# Altium PCB PCB1.PcbDoc
Units mm, origin at the board's own origin, x right, y up, seen from the top; angles counter-clockwise.
Board outline 94.2 x 98.2 mm, 2 copper layers (Top Layer, Bottom Layer); 39 components, 14 nets, 159 pads, 148 vias.
Unrouted connection lines stored in the file: 40.
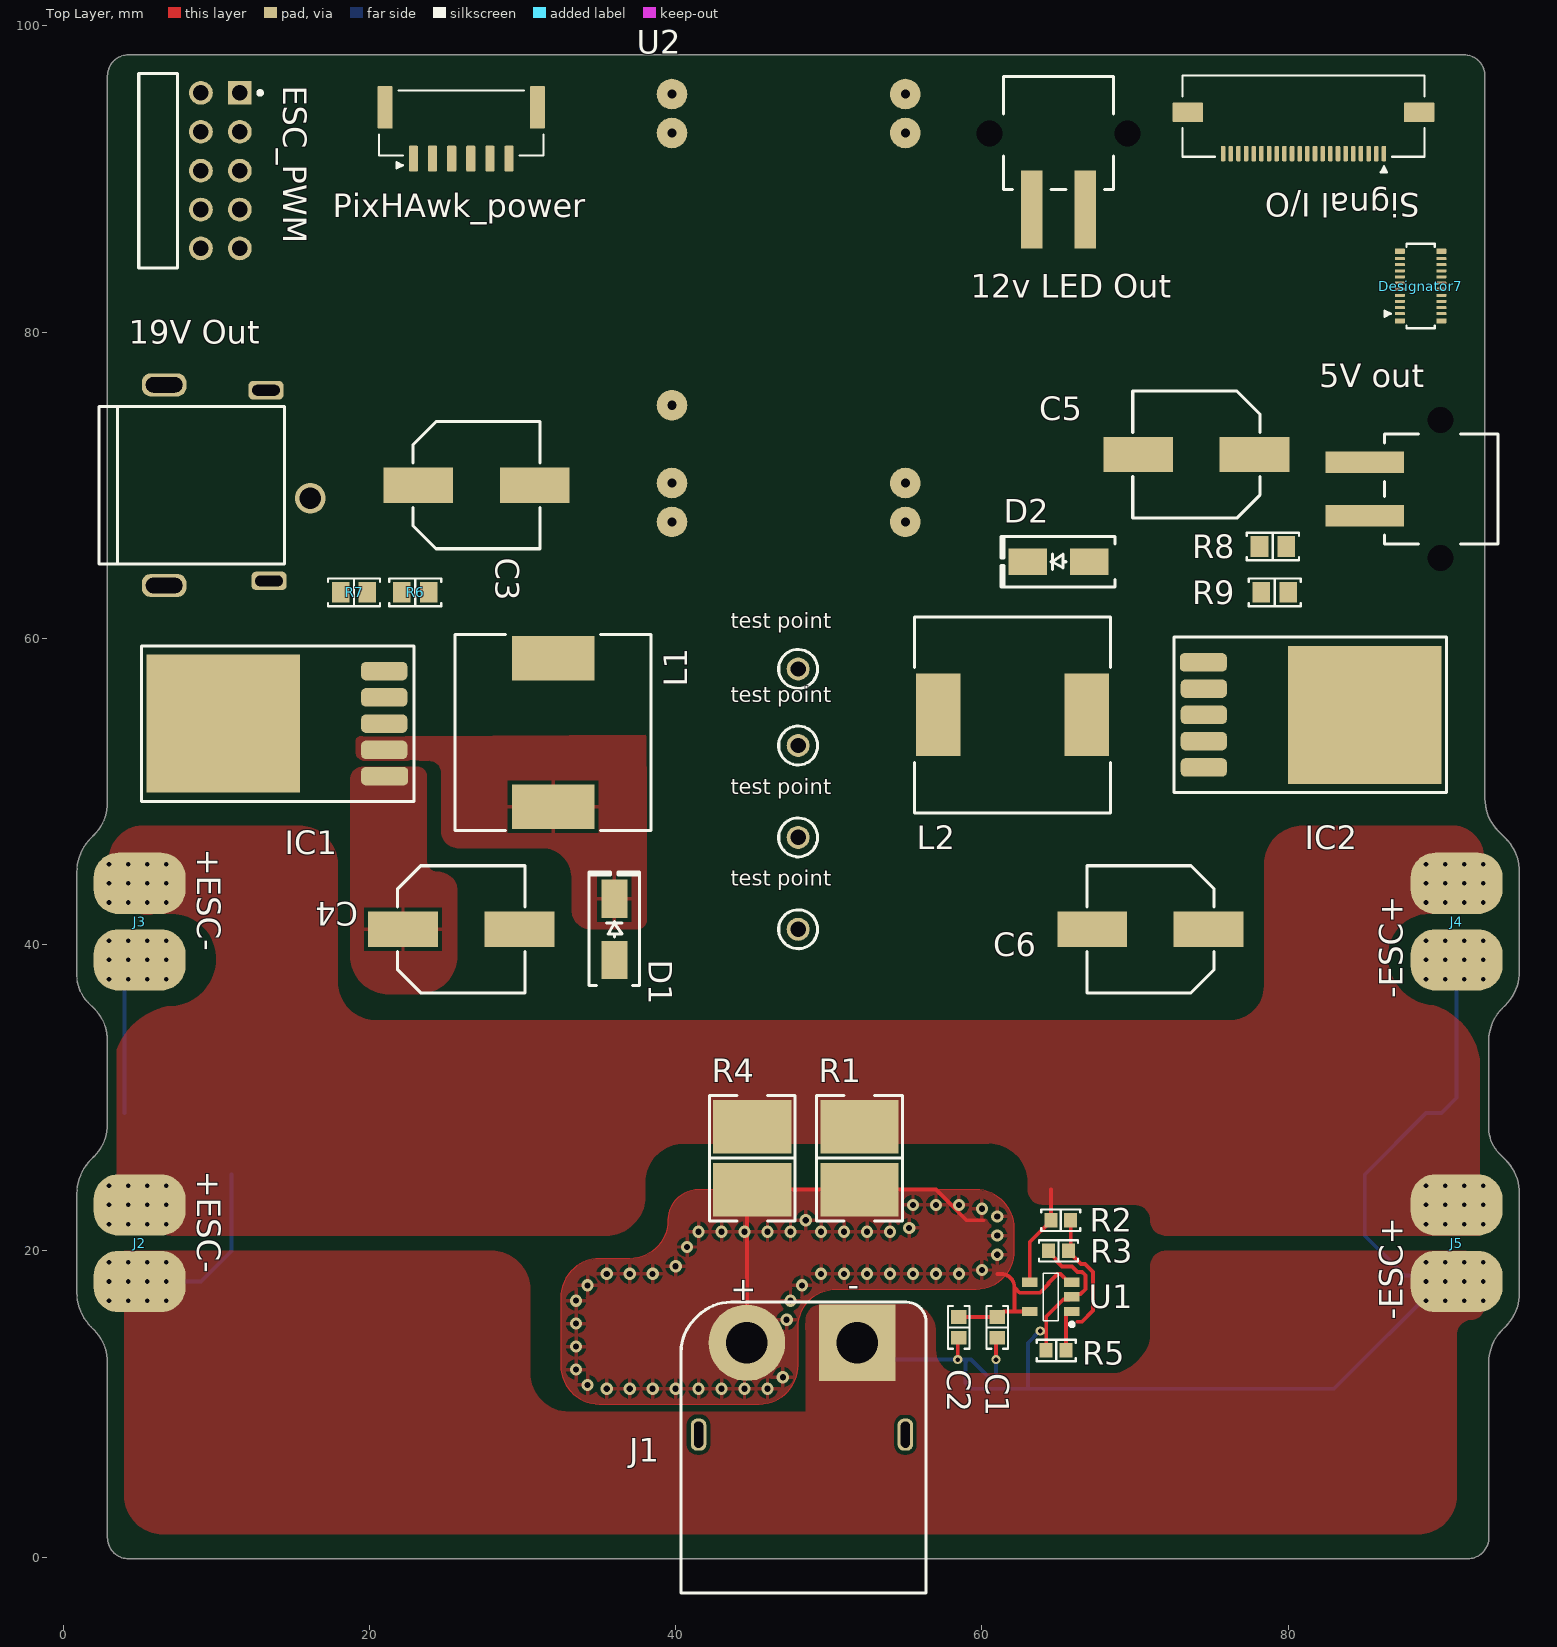
[diagram p0: Top Layer view]
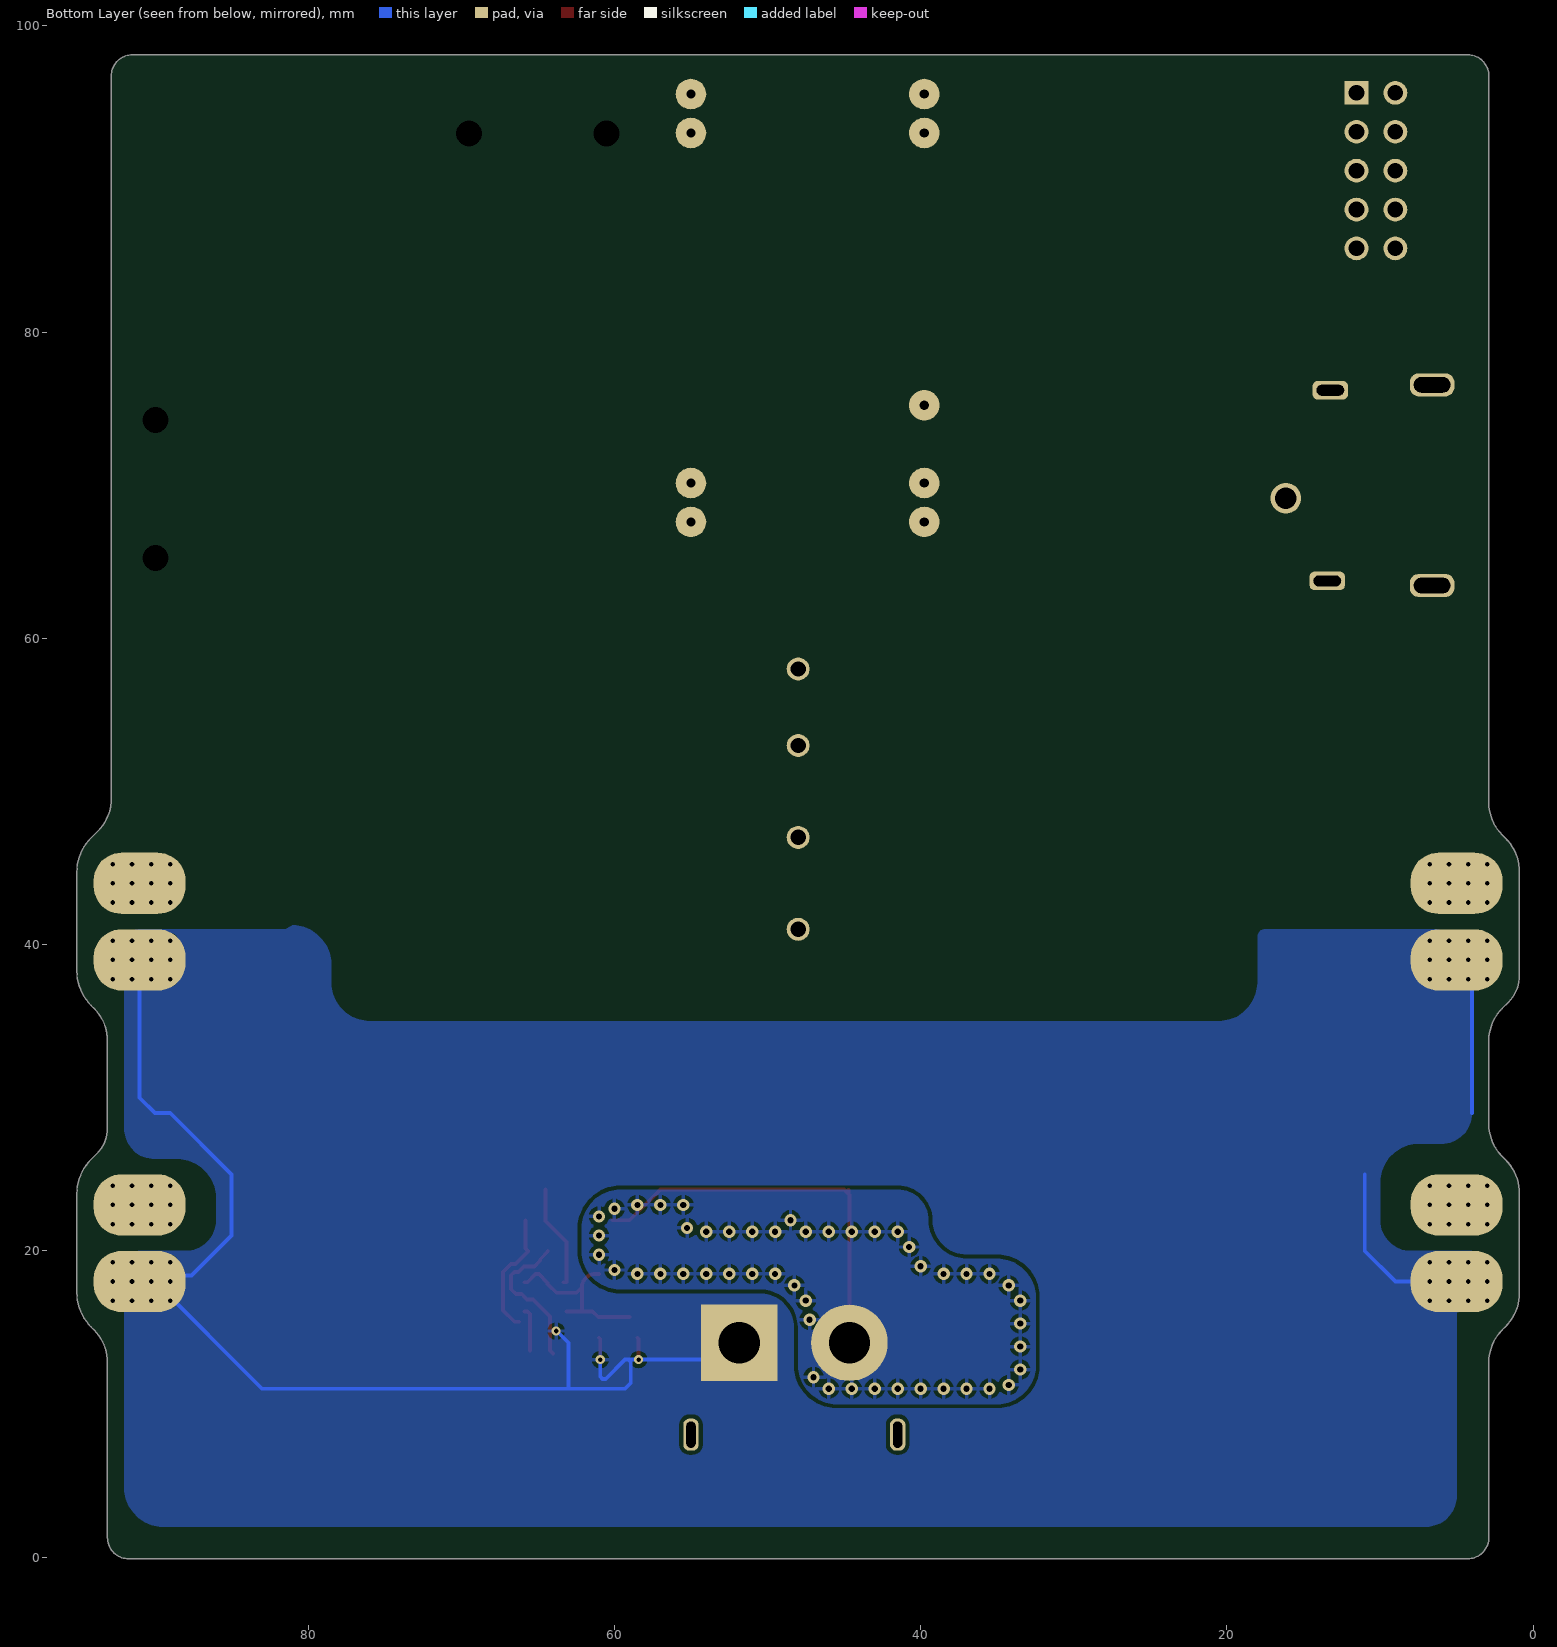
[diagram p1: Bottom Layer view, seen from below]

## Layer stack, top to bottom
Top Solder: solder mask 0.0102, Solder Resist, Dk 3.5
Top Layer: signal copper 0.0356
Dielectric 1: dielectric 0.32, FR-4, Dk 4.8
Bottom Layer: signal copper 0.0356
Bottom Solder: solder mask 0.0102, Solder Resist, Dk 3.5

## Board outline
1.827,15.031 cw(c4.066,17.27) 0.9,17.27 0.9,23.73 cw(c4.066,23.73) 1.827,25.969 2.031,26.173 ccw(c-0.066,28.27) 2.9,28.27 2.9,33.73 ccw(c-0.066,33.73) 2.031,35.827 1.636,36.222 cw(c3.414,38) 0.9,38 0.9,44.73 cw(c4.066,44.73) 1.827,46.969 2.031,47.173 ccw(c-0.066,49.27) 2.9,49.27 2.9,96.73 cw(c4.27,96.73) 4.27,98.1 91.48,98.1 cw(c91.48,96.73) 92.85,96.73 92.85,49.52 ccw(c95.816,49.52) 93.719,47.423 94.173,46.969 cw(c91.934,44.73) 95.1,44.73 95.1,38.27 cw(c91.934,38.27) 94.173,36.031 93.969,35.827 ccw(c96.066,33.73) 93.1,33.73 93.1,28 ccw(c95.414,28) 93.778,26.364 cw(c93.707,26.293) 93.778,26.364 94.173,25.969 cw(c91.934,23.73) 95.1,23.73 95.1,17.27 cw(c91.934,17.27) 94.173,15.031 93.969,14.827 ccw(c96.066,12.73) 93.1,12.73 93.1,1.27 cw(c91.73,1.27) 91.73,-0.1 4.27,-0.1 cw(c4.27,1.27) 2.9,1.27 2.9,12.73 ccw(c-0.066,12.73) 2.031,14.827

## Design rules (kind name [scope] priority, off if disabled: settings)
Clearance [All] p1: gap=0.254 ignorepadtopadclearanceinfootprint=FALSE except(0: Arc-Hole Track-Hole SMDPad-Hole THPad-Hole Via-Hole Fill-Hole Poly-Hole Region-Hole Text-Hole)
PolygonConnect [All] p1: connectstyle=Relief reliefconductorwidth=0.254 reliefentries=4 polygonreliefangle="90 Angle" airgapwidth=0.254
RoutingVias [All] p1: holewidth=0.711 width=1.27 viastyle="Through Hole" minholewidth=0.711 minwidth=1.27 maxholewidth=0.711 maxwidth=1.27
SolderMaskExpansion [All] p1: expansion=0.102 istentingtop=FALSE
Width [All] p1: maxlimit=0.254 minlimit=0.254 preferedwidth=0.254
30 further rules are at their usual default settings.

## Classes and differential pairs
component class Sheet1: "12v LED Out" "19V Out" C1 C2 C3 C4 C5 C6 D1 D2 IC1 IC2 J1 J2 J3 J4 J5 L1 L2 R1 R2 R3 R4 R5 R6 R7 R8 R9 U1 U2

## Components (designator, comment, footprint, x,y, rotation, side; value= is the part's Value field where it differs from the comment)
"5V out" "691508110302" "WURTH 691508110302" 90,69.75 r270 top (schematic designator J7)
"12v LED Out" "691508110302" "WURTH 691508110302" 65,93 r0 top (schematic designator J8)
"19V Out" "PJ-068B-SMT-TR" "CUI PJ-068B-SMT" 9,70 r90 top (schematic designator J6)
C1 "10µF" "CAP 0603_1608" 61,15 r90 top
C2 "0.1µF" "CAP 0603_1608" 58.486,15 r90 top
C3 "220µF" "CAP ALSMD 8.3MM H10.5MM" 27,70 r0 top
C4 "100µF" "CAP ALSMD 8.3MM H10.5MM" 26,41 r0 top
C5 "220µF" "CAP ALSMD 8.3MM H10.5MM" 74,72 r180 top
C6 "100µF" "CAP ALSMD 8.3MM H10.5MM" 71,41 r180 top
D1 "ACDBA560-HF" "DO214AC SMA" 36,41 r90 top
D2 "ACDBA560-HF" "DO214AC SMA" 65,65 r180 top
Designator7 "Comment" HIRO-DF40C-20DP-0.4V(51)_V 88.645,83 r90 top
ESC_PWM "Comment" FCI-68021-210HLF-10_V 10.27,90.54 r270 top
IC1 "LM2596" D2PAK 12.11,54.429 r90 top
IC2 "LM2596" D2PAK 83.349,55 r270 top
J1 "XT60pw" XT60_90degree 56.35,-2.35 r180 top
J2 "ESC PAD" "ESC Connector" 1.75,15.25 r0 top
J3 "ESC PAD" "ESC Connector" 1.75,36.25 r0 top
J4 "ESC PAD" "ESC Connector" 87.75,36.25 r0 top
J5 "ESC PAD" "ESC Connector" 87.75,15.25 r0 top
L1 "33µH" "BOURNS SRR1280" 32,53.85 r90 top
L2 "33µH" "BOURNS SRR1280" 62,55 r180 top
PixHAwk_power "Comment" JST-BM06B-GHS-TBT_V 26,93 r0 top
R1 "1 mOhms" "VISHAY WSHP2818" 52,26.055 r90 top
R2 "10 kOhms" "RES 0603_1608" 65.15,22 r180 top
R3 "10 kOhms" "RES 0603_1608" 65,20 r0 top
R4 "1 mOhms" "VISHAY WSHP2818" 45,26.055 r90 top
R5 "10 kOhms" "RES 0603_1608" 64.85,13.5 r0 top
R6 "10 kOhms" "RES 0805_2012" 23,63 r0 top
R7 "4.7 kOhms" "RES 0805_2012" 19,63 r0 top
R8 "10 kOhms" "RES 0805_2012" 79,66 r0 top
R9 "4.7 kOhms" "RES 0805_2012" 79.125,63 r0 top
"Signal I/O" "Comment" MOLX-5051102291_V 81,93 r180 top
"test point" "Comment" KSTN-5003 48,41 r0 top
"test point" "Comment" KSTN-5003 48,47 r0 top
"test point" "Comment" KSTN-5003 48,53 r0 top
"test point" "Comment" KSTN-5003 48,58 r0 top
U1 "INA169" INA169 64.5,17 r180 top
U2 "Led Driver" LDD100l 39.76,67.6 r180 top

## Footprints (in the part's own frame and the unit in brackets; to place one, negate y for a bottom-side part, rotate by r counter-clockwise, add the part's x,y. Pads: shape width x height; smd on the part's side, far side on the other; paste and mask are expansions set on the pad)
"BOURNS SRR1280" [mm] "Precision Wire Wound Inductor, 2-Leads, Body 12.50x12.50mm, IPC Medium Density"
  rect 2.9x5.4 smd: 1(-4.85,0) 2(4.85,0)
  silkscreen extent -6.4,-6.4 6.4,6.4, body extent -6.25,-6.25 6.25,6.25, height 7.9
"CAP 0603_1608" [mm] "Chip Capacitor, 2-Leads, Body 1.60x0.80mm, IPC Medium Density"
  rect 0.9x1 smd: 1(-0.675,0) 2(0.675,0)
  silkscreen extent -1.4,-0.7 1.4,0.7, body extent -0.8,-0.41 0.8,0.41, height 0.82
"CAP ALSMD 8.3MM H10.5MM" [mm] "Aluminum Electrolytic Capacitor, Body 8.30x8.30x10.50mm, IPC Low Density"
  rect 4.55x2.3 smd: 1(-3.8,0) 2(3.8,0)
  silkscreen extent -4.15,-4.15 4.15,4.15, body extent -4.95,-4.15 4.95,4.15, height 10.5
"CUI PJ-068B-SMT" [mm] "Mid Mount DC Power Jack"
  round 2 hole 1.4 unplated: 1(-0.85,-7.15)
  rrect75% 1.5x2.9 hole 1 slot 2.4 at 90 deg unplated: 2(-6.55,2.4) 2(6.55,2.4)
  rrect50% 1.2x2.3 hole 0.7 slot 1.8 at 90 deg unplated: 2(6.2,-4.25) 3(-6.25,-4.45)
  silkscreen extent -5.15,-5.45 5.15,6.65, body extent -6.55,-7.7 6.55,6.6, height 5.45
D2PAK [mm]
  rrect50% 1.2x3.075 smd: 1(-3.429,-8.89)
  rrect50% 1.2x3.015 smd: 2(-1.714,-8.86) 3(0,-8.86) 4(1.715,-8.86) 5(3.429,-8.86)
  rect 9x10 smd: 3(0,1.651)
  silkscreen extent -5.08,-10.79 5.08,6.98, body extent -4.91,-9.56 4.91,5.04, height 4.22
"DO214AC SMA" [mm] "Molded Diode, 2-Leads, Body 4.30x2.60mm, IPC Medium Density"
  rect 2.5x1.7 smd: 1(-2,0) 2(2,0)
  silkscreen extent -3.68,-1.65 3.75,1.65, body extent -2.6,-1.37 2.6,1.37, height 2.4
"ESC Connector" [mm]
  rrect80% 6x4 / inner rrect90% 6x4 / far side rrect90% 6x4 all layers, no hole: 1(3.25,7.75) 2(3.25,2.75)
FCI-68021-210HLF-10_V [mm] "THD, 10-Leads, Body 12.7x2.54mm, Pitch 2.54mm"
  rect 1.55x1.55 hole 1.02: 1(-5.08,1.27)
  round 1.55 hole 1.02: 2(-2.54,1.27) 3(0,1.27) 4(2.54,1.27) 5(5.08,1.27) 6(5.08,-1.27) 7(2.54,-1.27) 8(0,-1.27) 9(-2.54,-1.27) 10(-5.08,-1.27)
  silkscreen extent -6.35,-5.33 6.35,2.72, body extent -6.32,-11.13 6.32,1.64, height 4.83
HIRO-DF40C-20DP-0.4V(51)_V [mm] "CONN, 20-Lead, Body 5.52x1.85mm, Pitch 0.4mm"
  rrect50% 0.2x0.66 smd: 1(-1.8,1.355) 2(-1.8,-1.355) 3(-1.4,1.355) 4(-1.4,-1.355) 5(-1,1.355) 6(-1,-1.355) 7(-0.6,1.355) 8(-0.6,-1.355) 9(-0.2,1.355) 10(-0.2,-1.355) 11(0.2,1.355) 12(0.2,-1.355) 13(0.6,1.355) 14(0.6,-1.355) 15(1,1.355) 16(1,-1.355) 17(1.4,1.355) 18(1.4,-1.355) 19(1.8,1.355) 20(1.8,-1.355)
  rrect35% 0.35x0.66 smd: MP1(-2.275,1.355) MP2(-2.275,-1.355) MP3(2.275,1.355) MP4(2.275,-1.355)
  silkscreen extent -2.76,-0.92 2.76,2.35, body extent -2.76,-1.49 2.76,1.48, height 1.14
INA169 [mm] "SOT23, 5-Leads, Body 2,90x2,80mm, Pitch 0,95mm, IPC Medium Density"
  rect 1x0.6 smd: 1(-1.375,0.95) 2(-1.375,0) 3(-1.375,-0.95) 4(1.375,-0.95) 5(1.375,0.95)
  silkscreen extent -1.5,-1.55 0.5,1.92, body extent -1.5,-1.53 1.5,1.53, height 1.45
JST-BM06B-GHS-TBT_V [mm] "Connector, 6-Leads, Body 10.75x4.25mm, Pitch 1.25mm"
  rrect30% 0.6x1.7 smd: 1(-3.125,-1.675) 2(-1.875,-1.675) 3(-0.625,-1.675) 4(0.625,-1.675) 5(1.875,-1.675) 6(3.125,-1.675)
  rrect20% 1x2.8 smd: MP1(-4.975,1.675) MP2(4.975,1.675)
  silkscreen extent -5.38,-2.31 5.38,2.78, body extent -5.38,-2.17 5.37,2.78, height 4.2
KSTN-5003 [mm] "Test Point, Through Hole, Dia 2.54mm"
  round 1.5 hole 1: 1(0,0)
  silkscreen extent -1.27,-1.27 1.27,1.27, body extent -1.27,-1.27 1.27,1.27, height 4.57
LDD100l [mm]
  round 2 hole 0.6: 1(-15.24,0) 2(-15.24,-2.54) 11(-15.24,-25.4) 12(-15.24,-27.94) 13(0,-27.94) 14(0,-25.4) 21(0,-7.62) 23(0,-2.54) 24(0,0)
  body extent -17.79,-29.83 2.55,2.03, height 12.21
MOLX-5051102291_V [mm] "SMD, 22-Leads, Body 5.3x16.5mm, Pitch 0.5mm"
  rrect50% 0.3x1 smd: 1(-5.25,1.35) 2(-4.75,1.35) 3(-4.25,1.35) 4(-3.75,1.35) 5(-3.25,1.35) 6(-2.75,1.35) 7(-2.25,1.35) 8(-1.75,1.35) 9(-1.25,1.35) 10(-0.75,1.35) 11(-0.25,1.35) 12(0.25,1.35) 13(0.75,1.35) 14(1.25,1.35) 15(1.75,1.35) 16(2.25,1.35) 17(2.75,1.35) 18(3.25,1.35) 19(3.75,1.35) 20(4.25,1.35) 21(4.75,1.35) 22(5.25,1.35)
  rrect15% 2x1.3 smd: MP1(-7.55,-1.35) MP2(7.55,-1.35)
  silkscreen extent -7.9,-3.75 7.9,2.57, body extent -8.25,-3.75 8.25,1.55, height 1.9
"RES 0603_1608" [mm] "Chip Resistor, 2-Leads, Body 1.60x0.80mm, IPC Medium Density"
  rect 0.85x0.95 smd: 1(-0.65,0) 2(0.65,0)
  silkscreen extent -1.27,-0.7 1.27,0.7, body extent -0.8,-0.4 0.8,0.4, height 0.45
"RES 0805_2012" [mm] "Chip Resistor, 2-Leads, Body 2.00x1.25mm, IPC Medium Density"
  rect 1.15x1.35 smd: 1(-0.875,0) 2(0.875,0)
  silkscreen extent -1.7,-0.9 1.7,0.9, body extent -1,-0.62 1,0.63, height 0.6
"VISHAY WSHP2818" [mm] "Chip Resistor, 2-Leads, Body 7.10x4.60mm, IPC Medium Density"
  rect 3.5x5.1 smd: 1(-2.055,0) 2(2.055,0)
  silkscreen extent -4.1,-2.8 4.1,2.8, body extent -3.55,-2.3 3.55,2.3, height 1.5
"WURTH 691508110302" [mm]
  rect 1.4x5.1 smd: 1(-1.75,-5) 2(1.75,-5)
  round 1 hole 1.7 unplated: M(-4.5,-0.05) M(4.5,-0.05)
  silkscreen extent -3.6,-3.7 3.6,3.7, body extent -5.18,-7.2 5.18,3.7, height 11.2
XT60_90degree [mm]
  round 5 hole 2.7: 1(11.7,-16.35)
  rect 5x5 hole 2.7: 2(4.5,-16.35)
  rrect80% 1x2.1 hole 0.6 slot 1.7 at 90 deg: 4(1.35,-10.35) 4(14.85,-10.35)
  silkscreen extent 0,-19 16,0, body extent 0.33,-17.6 15.82,0, height 9.2

## Part data
"5V out" "12v LED Out": "TERM BLOCK 2POS 3.5MM SMD", Color=Black, Current=10A, Manufacturer="Würth Elektronik", Supplier Part Number 1=732-5963-1-ND, Voltage=300V, ComponentLink1Description=Datasheet, ComponentLink1URL=https://katalog.we-online.de/em/datasheet/6915081103xx.pdf, ComponentLink2Description="DigiKey Link", ComponentLink2URL=http://digikey.com/product-detail/en/w-rth-elektronik/691508110302/732-5963-1-ND/5047612, Features="Board Guide, Mounting Flange", LastUpdated="15.01.2020 04:18:55", Lifecycle Status=Active, Mating Orientation="Horizontal and Vertical with Board", Minimum Order=1, Mounting Type="Surface Mount", Number of Levels=1, Packaging=TapeAndReel, Part Number=691508110302, Part Status=Active, Pitch="0.138\" (3.50mm)", Positions Per Level=2, Price=1.57, Series="WR-TBL Series 5081", Supplier 1=DigiKey, Wire Gauge="16-30 AWG", Wire Termination="Screw - Rising Cage Clamp"
"19V Out": "CONN PWR JACK 2.5X5.5MM SOLDER", Current Rating (Amps)=5A, Manufacturer="CUI Devices", Material Flammability Rating="UL94 V-0", Supplier Part Number 1=CP-068BPJTR-ND, Voltage - Rated=24VDC, Actual Diameter="0.098\" (2.50mm ID), 0.232\" (5.90mm OD)", ComponentLink1Description=Datasheet, ComponentLink1URL=https://www.cuidevices.com/product/resource/digikeypdf/pj-068b-smt-tr.pdf, ComponentLink2Description="DigiKey Link", ComponentLink2URL=//digikey.com/product-detail/en/cui-devices/PJ-068B-SMT-TR/CP-068BPJTR-ND/2625163, Connector Type=Jack, Features="Board Guide", Gender=Male, LastUpdated="16.12.2019 18:57:10", Lifecycle Status=0, Mating Length/Depth="0.323\" (8.20mm)", Minimum Order=1, Mounting Type="Surface Mount, Right Angle", Number of Positions/Contacts="2 Conductors, 3 Contacts", Packaging=TapeAndReel, Part Number=PJ-068B-SMT-TR, Part Status=Active, Price=1.38, Series=-, Shielding=Shielded, Supplier 1=DigiKey, Termination=Solder, Industry Recognized Mating Diameter="2.50mm ID (0.098\"), 5.50mm OD (0.217\")", Internal Switch(s)="Single Switch, Normally Closed"
C1: library part GRM188R6YA106MA73D, "CAP CER 10UF 35V X5R 0603", Device Package="0603 (1608 Metric)", Manufacturer="Murata Electronics", Operating Temperature="-55°C ~ 85°C", Supplier Part Number 1=490-13248-1-ND, Temperature Coefficient=X5R, Tolerance=±20%, Voltage - Rated=35V, Applications="General Purpose", Capacitance=10µF, ComponentLink1Description=Datasheet, ComponentLink1URL=https://www.murata.com/~/media/webrenewal/support/library/catalog/products/capacitor/mlcc/c02e.ashx?la=en-us, ComponentLink2Description="DigiKey Link", ComponentLink2URL=http://digikey.com/product-detail/en/murata-electronics/GRM188R6YA106MA73D/490-13248-1-ND/5877456, LastUpdated="2.09.2020 01:03:25", Lifecycle Status=Active, Minimum Order=1, Mounting Type="Surface Mount, MLCC", Package / Case="0603 (1608 Metric)", Packaging=TapeAndReel, Part Number=GRM188R6YA106MA73D, Part Status=Active, PartId=8560, Price=0.09, Series=GRM, Size / Dimension="0.063\" L x 0.031\" W (1.60mm x 0.80mm)", Supplier 1=DigiKey, Thickness (Max)="0.039\" (1.00mm)"
C2: library part GMK107BJ104KAHT, "CAP CER 0.1UF 35V X5R 0603", Device Package="0603 (1608 Metric)", Manufacturer="Taiyo Yuden", Operating Temperature="-55°C ~ 85°C", Ratings=AEC-Q200, Supplier Part Number 1=587-3357-1-ND, Temperature Coefficient=X5R, Tolerance=±10%, Voltage - Rated=35V, Applications=Automotive, Capacitance=0.1µF, ComponentLink1Description=Datasheet, ComponentLink1URL="https://ds.yuden.co.jp/TYCOMPAS/ut/detail?pn=GMK107BJ104KAHT  &u=M", ComponentLink2Description="DigiKey Link", ComponentLink2URL=http://digikey.com/product-detail/en/taiyo-yuden/GMK107BJ104KAHT/587-3357-1-ND/4157244, LastUpdated="2.09.2020 01:03:32", Lifecycle Status=Active, Minimum Order=1, Mounting Type="Surface Mount, MLCC", Package / Case="0603 (1608 Metric)", Packaging=TapeAndReel, Part Number=GMK107BJ104KAHT, Part Status=Active, PartId=4191, Price=0.02, Series=M, Size / Dimension="0.063\" L x 0.031\" W (1.60mm x 0.80mm)", Supplier 1=DigiKey, Thickness (Max)="0.035\" (0.90mm)"
C3 C5: library part EEE-FK1V221GP, "CAP ALUM 220UF 20% 35V SMD", Device Package="Radial, Can - SMD", Lifetime @ Temp.="5000 Hrs @ 105°C", Manufacturer="Panasonic Electronic Components", Operating Temperature="-55°C ~ 105°C", Ratings=AEC-Q200, Ripple Current @ High Frequency="600mA @ 100kHz", Ripple Current @ Low Frequency="450mA @ 120Hz", Supplier Part Number 1=PCE4321CT-ND, Tolerance=±20%, Voltage - Rated=35V, Applications=Automotive, Capacitance=220µF, ComponentLink1Description=Datasheet, ComponentLink1URL=http://industrial.panasonic.com/www-cgi/jvcr13pz.cgi?E+PZ+4+ABA0120+EEEFK1V221GP+8+WW, ComponentLink2Description="DigiKey Link", ComponentLink2URL=http://digikey.com/product-detail/en/panasonic-electronic-components/EEE-FK1V221GP/PCE4321CT-ND/1014320, Height - Seated (Max)="0.413\" (10.50mm)", LastUpdated="2.09.2020 01:25:16", Lifecycle Status=Active, Minimum Order=1, Mounting Type="Surface Mount", Package / Case="Radial, Can - SMD", Packaging=TapeAndReel, Part Number=EEE-FK1V221GP, Part Status=Active, PartId=7494, Polarization=Polar, Price=0.33, Series=FK, Size / Dimension="0.315\" Dia (8.00mm)", Supplier 1=DigiKey, Surface Mount Land Size="0.327\" L x 0.327\" W (8.30mm x 8.30mm)", Impedance="160 mOhms"
C4 C6: library part UCD1V101MNL1GS, "CAP ALUM 100UF 20% 35V SMD", Device Package="Radial, Can - SMD", Lifetime @ Temp.="5000 Hrs @ 105°C", Manufacturer=Nichicon, Operating Temperature="-55°C ~ 105°C", Ratings=AEC-Q200, Ripple Current @ High Frequency="600mA @ 100kHz", Ripple Current @ Low Frequency="300mA @ 120Hz", Supplier Part Number 1=493-6186-1-ND, Tolerance=±20%, Voltage - Rated=35V, Applications=Automotive, Capacitance=100µF, ComponentLink1Description=Datasheet, ComponentLink1URL=http://nichicon-us.com/english/products/pdfs/e-ucd.pdf, ComponentLink2Description="DigiKey Link", ComponentLink2URL=http://digikey.com/product-detail/en/nichicon/UCD1V101MNL1GS/493-6186-1-ND/3438699, Height - Seated (Max)="0.413\" (10.50mm)", LastUpdated="2.09.2020 01:25:16", Lifecycle Status=Active, Minimum Order=1, Mounting Type="Surface Mount", Package / Case="Radial, Can - SMD", Packaging=TapeAndReel, Part Number=UCD1V101MNL1GS, Part Status=Active, PartId=7455, Polarization=Polar, Price=0.19, Series=UCD, Size / Dimension="0.315\" Dia (8.00mm)", Supplier 1=DigiKey, Surface Mount Land Size="0.327\" L x 0.327\" W (8.30mm x 8.30mm)", Impedance="160 mOhms"
D1 D2: "DIODE SCHOTTKY 60V 5A DO214AC", Capacitance @ Vr, F="250pF @ 4V, 1MHz", Current - Average Rectified (Io)="5A (DC)", Current - Reverse Leakage @ Vr="500µA @ 60V", Manufacturer="Comchip Technology", Operating Temperature - Junction="-55°C ~ 125°C", Package / Case="DO-214AC, SMA", Supplier Device Package="DO-214AC (SMA)", Supplier Part Number 1=641-2078-1-ND, Voltage - DC Reverse (Vr) (Max)=60V, Voltage - Forward (Vf) (Max) @ If="700mV @ 5A", ComponentLink1Description=Datasheet, ComponentLink1URL=http://www.comchiptech.com/admin/files/product/ACDBA560-HF%20RevA201382.pdf, ComponentLink2Description="DigiKey Link", ComponentLink2URL=http://digikey.com/product-detail/en/comchip-technology/ACDBA560-HF/641-2078-1-ND/10131664, Diode Type=Schottky, LastUpdated="2.09.2020 01:19:04", Lifecycle Status=Active, Minimum Order=1, Mounting Type="Surface Mount", Packaging=TapeAndReel, Part Number=ACDBA560-HF, Part Status=Active, PartId=1832, Price=0.13, Series="Automotive, AEC-Q101", Speed="Fast Recovery =< 500ns, > 200mA (Io)", Supplier 1=DigiKey
J1: library part XT60PW-M, "xt60 90 degree Connector"
J2 J3 J4 J5: library part "ESC Connector"
L1 L2: library part SRR1280-330M, "FIXED IND 33UH 3.5A 57 MOHM SMD", Current - Saturation=3.3A, Current Rating (Amps)=3.5A, DC Resistance (DCR)="57mOhm Max", Device Package=Nonstandard, Frequency - Self Resonant=9.5MHz, Manufacturer="Bourns Inc.", Operating Temperature="-40°C ~ 125°C", Q @ Freq="28 @ 2.52MHz", Supplier Part Number 1=SRR1280-330MCT-ND, Tolerance=±20%, Inductance Frequency - Test=100kHz, ComponentLink1Description=Datasheet, ComponentLink1URL=https://www.bourns.com/docs/Product-Datasheets/SRR1280.pdf, ComponentLink2Description="DigiKey Link", ComponentLink2URL=http://digikey.com/product-detail/en/bourns-inc/SRR1280-330M/SRR1280-330MCT-ND/2127440, Height - Seated (Max)="0.315\" (8.00mm)", LastUpdated="2.09.2020 01:22:09", Lifecycle Status=Active, Material - Core=Ferrite, Minimum Order=1, Mounting Type="Surface Mount", Package / Case=Nonstandard, Packaging=TapeAndReel, Part Number=SRR1280-330M, Part Status=Active, PartId=25, Price=0.65, Series=SRR1280, Shielding=Shielded, Size / Dimension="0.492\" L x 0.492\" W (12.50mm x 12.50mm)", Supplier 1=DigiKey, Type=Wirewound, Inductance=33µH
R1 R4: library part WSHP28181L000FEA, "RES 0.001 OHM 1% 10W 2818", Device Package=Nonstandard, Manufacturer="Vishay Dale", Operating Temperature="-65°C ~ 170°C", Power (Watts)=10W, Ratings=AEC-Q200, Supplier Device Package=2818, Supplier Part Number 1=541-3272-1-ND, Temperature Coefficient=±200ppm/°C, Tolerance=±1%, ComponentLink1Description=Datasheet, ComponentLink1URL=http://www.vishay.com/docs/30347/wshp2818.pdf, ComponentLink2Description="DigiKey Link", ComponentLink2URL=http://digikey.com/product-detail/en/vishay-dale/WSHP28181L000FEA/541-3272-1-ND/6605248, Composition="Metal Element", Features="Automotive AEC-Q200, Current Sense, Moisture Resistant, Pulse Withstanding", Height - Seated (Max)="0.069\" (1.75mm)", LastUpdated="2.09.2020 01:27:09", Lifecycle Status=Active, Minimum Order=1, Number of Terminations=2, Package / Case=Nonstandard, Packaging=TapeAndReel, Part Number=WSHP28181L000FEA, Part Status=Active, PartId=2682, Price=0.90, Resistance="1 mOhms", Series=WSHP2818, Size / Dimension="0.280\" L x 0.181\" W (7.10mm x 4.60mm)", Supplier 1=DigiKey
R2 R3 R5: library part RNCS0603BKE10K0, "RES 10K OHM 0.1% 1/16W 0603", Device Package="0603 (1608 Metric)", Manufacturer="Stackpole Electronics Inc", Operating Temperature="-55°C ~ 155°C", Power (Watts)="0.063W, 1/16W", Ratings=AEC-Q200, Supplier Device Package=0603, Supplier Part Number 1=RNCS0603BKE10K0CT-ND, Temperature Coefficient=±25ppm/°C, Tolerance=±0.1%, ComponentLink1Description=Datasheet, ComponentLink1URL=https://www.seielect.com/catalog/sei-rncs_rnch.pdf, ComponentLink2Description="DigiKey Link", ComponentLink2URL=http://digikey.com/product-detail/en/stackpole-electronics-inc/RNCS0603BKE10K0/RNCS0603BKE10K0CT-ND/1800113, Composition="Thin Film", Features="Anti-Corrosive, Automotive AEC-Q200, Moisture Resistant", Height - Seated (Max)="0.022\" (0.55mm)", LastUpdated="2.09.2020 01:10:25", Lifecycle Status=Active, Minimum Order=1, Number of Terminations=2, Package / Case="0603 (1608 Metric)", Packaging=TapeAndReel, Part Number=RNCS0603BKE10K0, Part Status=Active, PartId=4838, Price=0.08, Resistance="10 kOhms", Series=RNCS, Size / Dimension="0.061\" L x 0.031\" W (1.55mm x 0.80mm)", Supplier 1=DigiKey
R6 R8: library part RNCP0805FTD10K0, "RES 10K OHM 1% 1/4W 0805", Device Package="0805 (2012 Metric)", Manufacturer="Stackpole Electronics Inc", Operating Temperature="-55°C ~ 155°C", Power (Watts)="0.25W, 1/4W", Supplier Device Package=0805, Supplier Part Number 1=RNCP0805FTD10K0CT-ND, Temperature Coefficient=±100ppm/°C, Tolerance=±1%, ComponentLink1Description=Datasheet, ComponentLink1URL=https://www.seielect.com/catalog/sei-rncp.pdf, ComponentLink2Description="DigiKey Link", ComponentLink2URL=http://digikey.com/product-detail/en/stackpole-electronics-inc/RNCP0805FTD10K0/RNCP0805FTD10K0CT-ND/2240601, Composition="Thin Film", Features="Anti-Sulfur, Moisture Resistant", Height - Seated (Max)="0.024\" (0.60mm)", LastUpdated="2.09.2020 01:15:23", Lifecycle Status=Active, Minimum Order=1, Number of Terminations=2, Package / Case="0805 (2012 Metric)", Packaging=TapeAndReel, Part Number=RNCP0805FTD10K0, Part Status=Active, PartId=28021, Price=0.01, Resistance="10 kOhms", Series=RNCP, Size / Dimension="0.079\" L x 0.049\" W (2.00mm x 1.25mm)", Supplier 1=DigiKey
R7 R9: library part CRGP0805F4K7, "CRGP 0805 4K7 1%", Device Package="0805 (2012 Metric)", Manufacturer="TE Connectivity Passive Product", Operating Temperature="-55°C ~ 155°C", Power (Watts)="0.333W, 1/3W", Supplier Device Package=0805, Supplier Part Number 1=A130485CT-ND, Temperature Coefficient=±100ppm/°C, Tolerance=±1%, ComponentLink1Description=Datasheet, ComponentLink1URL=https://www.te.com/commerce/DocumentDelivery/DDEController?Action=srchrtrv&DocNm=9-1773463-9&DocType=DS&DocLang=English, ComponentLink2Description="DigiKey Link", ComponentLink2URL=http://digikey.com/product-detail/en/te-connectivity-passive-product/CRGP0805F4K7/A130485CT-ND/8578317, Composition="Thick Film", Features="Pulse Withstanding", Height - Seated (Max)="0.026\" (0.65mm)", LastUpdated="2.09.2020 01:15:22", Lifecycle Status=Active, Minimum Order=1, Number of Terminations=2, Package / Case="0805 (2012 Metric)", Packaging=TapeAndReel, Part Number=CRGP0805F4K7, Part Status=Active, PartId=28726, Price=0.02, Resistance="4.7 kOhms", Series=CRGP, Size / Dimension="0.079\" L x 0.049\" W (2.00mm x 1.25mm)", Supplier 1=DigiKey
U1: "Current sensing IC"
U2: library part LDD1000L, "LDD 1000L 12V 1A", ComponentLink1Description="New link", ComponentLink1URL=https://www.meanwell-web.com/en-gb/dc-dc-step-down-led-driver-constant-current-cc-ldd--1000l

## Via types
v1: diameter 0.45, hole 0.3, Top Layer to Bottom Layer, 96 vias
v2: diameter 0.8, hole 0.4, Top Layer to Bottom Layer, 49 vias
v3: diameter 0.6, hole 0.3, Top Layer to Bottom Layer, tented both sides, 3 vias

## Nets (pads, with @x,y where several pads share a name; then routed paths per layer and width w, separated by ;. In a path a pad name is that pad's centre, name@x,y a point inside that pad or via, vN(x,y) a via of type N, cw(c..) or ccw(c..) an arc to the next point about the centre after c; other vN are vias at no path point)
+5V: "5V out.1" C5.1 L2.2 R8.2
+12: "19V Out.1" C3.1 L1.2 R6.2
FeedBack: IC1.4 R6.1 R7.2
"FeedBack 5V": IC2.4 R8.1 R9.2
GND: "5V out.2" "19V Out.2" "19V Out.3" C1.1 C2.1 C3.2 C4.2 C5.2 C6.2 D1.1 D2.1 IC1.3 IC1.5 IC2.3 IC2.5 J1.2 J2.2 J3.2 J4.2 J5.2 R3.1 R5.1 R7.1 R9.1 U1.2 U2.1 U2.2 | length 113.9
  Top Layer w0.254: v3(58.42,12.9) 58.42,14.259 C2.1 ; v3(60.92,12.9) 60.92,14.245 C1.1 ; v3(63.806,14.766) 63.872,14.699 64.108,14.699 64.2,14.607 ; R5.1@64,13.3 R5.1 64.2,14.607 ; R3.1 64.35,19.95 64.844,19.456 64.844,19.367 65.221,18.99 65.891,18.99 66.251,18.631 66.533,18.631 66.756,18.408 66.756,17.492 66.437,17.173 66.048,17.173 U1.2 65.702,16.827 65.313,16.827 64.2,15.714 64.2,14.607
  Bottom Layer w0.254: 4,29 J3.2@4,38 ; v1(5.5,18) v1(6.75,18) 9,18 11,20 11,25 ; J1.2 52.95,12.9 v3(58.42,12.9) 59.077,12.9 ; v3(60.92,12.9) 60.92,11.788 60.772,11.639 60.561,11.639 59.3,12.9 59.077,12.9 ; v3(63.806,14.766) 63.766,14.766 63,14 63,11 ; J4.2 91,30 90,29 89,29 85,25 85,21 87.619,18.381 90.619,18.381 J5.2 v1(90.25,18) 90,18 83,11 63,11 ; 59.077,12.9 58.928,12.751 58.928,11.372 59.3,11 63,11
  other v1: 3,16.75 4.25,16.75 5.5,16.75 6.75,16.75 89,16.75 90.25,16.75 91.5,16.75 92.75,16.75 3,18 4.25,18 89,18 91.5,18 92.75,18 3,19.25 4.25,19.25 5.5,19.25 6.75,19.25 89,19.25 90.25,19.25 91.5,19.25 92.75,19.25 3,37.75 4.25,37.75 5.5,37.75 6.75,37.75 89,37.75 90.25,37.75 91.5,37.75 92.75,37.75 3,39 4.25,39 5.5,39 6.75,39 89,39 90.25,39 91.5,39 92.75,39 3,40.25 4.25,40.25 5.5,40.25 6.75,40.25 89,40.25 90.25,40.25 91.5,40.25 92.75,40.25
NetC1_2: C1.2 C2.2 J1.1 R1.1 R4.1 U1.3 U1.5 | length 38.5
  Top Layer w0.254: J1.1 44.65,23.65 R4.1 R1.1 57,24 59,22 60.123,22 ; R4.1@44.7,23.763 R4.1@44.7,23.981 ; 59,15.675 C1.2 61.05,15.675 61.425,16.05 62,16.05 ; 61,18.5 61.236,18.5 cw(c61.236,17.613) 62.123,17.613 ; U1.5 62,16.05 ; U1.3 65.675,17.95 65.143,18.482 64.932,18.482 64.358,17.907 64.358,17.844 63.783,17.269 62.467,17.269 62.123,17.613 ; 62,16.05 ccw(c62,16.173) 62.123,16.173 62.123,17.613
  other v2: 35.5,11 37,11 38.5,11 40,11 41.5,11 43,11 44.5,11 46,11 34.25,11.25 47,11.75 33.5,12.25 33.5,13.75 33.5,15.25 47.25,15.5 33.5,16.75 47.5,16.75 34.25,17.75 48.25,17.75 35.5,18.5 37,18.5 38.5,18.5 49.5,18.5 51,18.5 52.5,18.5 54,18.5 55.5,18.5 57,18.5 58.5,18.5 60,18.75 40,19 61,19.75 40.75,20.25 61,21 41.5,21.25 43,21.25 44.5,21.25 46,21.25 47.5,21.25 49.5,21.25 51,21.25 52.5,21.25 54,21.25 55.25,21.5 48.5,22 61,22.25 60,22.75 55.5,23 57,23 58.5,23
NetD1_2: D1.2 IC1.2 L1.1
NetD2_2: D2.2 IC2.2 L2.1
NetJ8_1: "12v LED Out.1" U2.13 U2.14
NetJ8_2: "12v LED Out.2" U2.11 U2.12
NetR2_1: R2.1 R3.2 | length 8.1
  Top Layer w0.254: R2.1 65.8,20.15 R3.2 65.65,19.95 66.461,19.139 66.743,19.139 67.264,18.618 67.264,16.1 66.533,15.369 66.234,15.369
NetR5_2: R5.2 U1.1 | length 2.8
  Top Layer w0.254: R5.2 65.5,15.875 65.675,16.05 U1.1
NetU2_21: U2.21
VCC: C4.1 C6.1 IC1.1 IC2.1 J2.1 J3.1 J4.1 J5.1 R1.2 R2.2 R4.2 U1.4 U2.23 U2.24 | length 6.8
  Top Layer w0.254: U1.4@63.325,17.95 U1.4 63.125,20.575 64.5,21.95 R2.2 64.5,24
  other v1: 3,21.75 4.25,21.75 5.5,21.75 6.75,21.75 89,21.75 90.25,21.75 91.5,21.75 92.75,21.75 3,23 4.25,23 5.5,23 6.75,23 89,23 90.25,23 91.5,23 92.75,23 3,24.25 4.25,24.25 5.5,24.25 6.75,24.25 89,24.25 90.25,24.25 91.5,24.25 92.75,24.25 3,42.75 4.25,42.75 5.5,42.75 6.75,42.75 89,42.75 90.25,42.75 91.5,42.75 92.75,42.75 3,44 4.25,44 5.5,44 6.75,44 89,44 90.25,44 91.5,44 92.75,44 3,45.25 4.25,45.25 5.5,45.25 6.75,45.25 89,45.25 90.25,45.25 91.5,45.25 92.75,45.25
pads on no net: "5V out.M" "12v LED Out.M" "Signal I/O.1" "Signal I/O.2" "Signal I/O.3" "Signal I/O.4" "Signal I/O.5" "Signal I/O.6" "Signal I/O.7" "Signal I/O.8" "Signal I/O.9" "Signal I/O.10" "Signal I/O.11" "Signal I/O.12" "Signal I/O.13" "Signal I/O.14" "Signal I/O.15" "Signal I/O.16" "Signal I/O.17" "Signal I/O.18" "Signal I/O.19" "Signal I/O.20" "Signal I/O.21" "Signal I/O.22" "Signal I/O.MP1" "Signal I/O.MP2" "test point.1" Designator7.1 Designator7.2 Designator7.3 Designator7.4 Designator7.5 Designator7.6 Designator7.7 Designator7.8 Designator7.9 Designator7.10 Designator7.11 Designator7.12 Designator7.13 Designator7.14 Designator7.15 Designator7.16 Designator7.17 Designator7.18 Designator7.19 Designator7.20 Designator7.MP1 Designator7.MP2 Designator7.MP3 Designator7.MP4 ESC_PWM.1 ESC_PWM.2 ESC_PWM.3 ESC_PWM.4 ESC_PWM.5 ESC_PWM.6 ESC_PWM.7 ESC_PWM.8 ESC_PWM.9 ESC_PWM.10 J1.4 PixHAwk_power.1 PixHAwk_power.2 PixHAwk_power.3 PixHAwk_power.4 PixHAwk_power.5 PixHAwk_power.6 PixHAwk_power.MP1 PixHAwk_power.MP2
copper on no net: | length 0
  Bottom Layer w0.254: 58.4,12.88 58.42,12.9

## Polygon pours and split planes (outlines as drawn)
NetD1_2 on Top Layer "NONET_L01_P-001" (solid, pour order 10): 19.1,53.3 cw(c19.4,53.3) 19.4,53.6 23.1,53.6 38,53.7 38.094,53.606 38.094,52.109 38.1,51.2 38.1,41.6 cw(c37.5,41.6) 37.5,41 34.5,41 cw(c34.5,42.3) 33.2,42.3 33.2,44.4 ccw(c31.3,44.4) 31.3,46.3 25.8,46.3 cw(c25.8,47.4) 24.7,47.4 24.7,51.2 ccw(c23.9,51.2) 23.9,52 19.7,52 cw(c19.7,52.6) 19.1,52.6
VCC on Top Layer "NONET_L01_P-001" (solid, pour order 9): 18.75,50.8 cw(c19.55,50.8) 19.55,51.6 23.15,51.6 cw(c23.15,51) 23.75,51 23.75,45.5 ccw(c24.5,45.5) 24.5,44.75 cw(c24.5,43.5) 25.75,43.5 25.75,39.29 cw(c23.21,39.29) 23.21,36.75 21.29,36.75 cw(c21.29,39.29) 18.75,39.29
VCC on Top Layer "VCC" (solid, pour order 0): 76.175,35.05 ccw(c76.175,37.3) 78.425,37.3 78.425,45.227 cw(c80.965,45.227) 80.965,47.767 88.34,47.767 91.039,47.767 cw(c90.613,45.637) 92.75,45.25 92,43 cw(c91,43) 91,42 89.5,42 ccw(c89.25,39.25) 86.5,39.5 ccw(c89.734,39.265) 89.5,36.031 cw(c88.147,31.842) 92.5,32.5 92.5,21 72,21 cw(c72,22) 71,22 ccw(c70,22) 70,23 64,23 cw(c64,24) 63,24 63,24.46 ccw(c60.46,24.46) 60.46,27 40.54,27 ccw(c40.54,24.46) 38,24.46 38,23.54 cw(c35.46,23.54) 35.46,21 7.05,21 cw(c7.134,25.3) 3.5,23 3.5,33.13 cw(c7.714,31.56) 6.784,35.96 ccw(c6.886,39.073) 10,39 ccw(c7.102,39.102) 7.204,42 6,42 cw(c5.5,44.5) 3,44 3,45 cw(c5.355,45.42) 4.936,47.775 15.385,47.775 cw(c15.385,45.235) 17.925,45.235 17.925,37.59 ccw(c20.465,37.59) 20.465,35.05
NetC1_2 on Top Layer "NONET_L01_P-001" (solid, pour order 5): 45,24 41.5,24 ccw(c41.5,22) 39.5,22 cw(c37,22) 37,19.5 35.04,19.5 ccw(c35.04,16.96) 32.5,16.96 32.5,12.5 ccw(c35,12.5) 35,10 45.46,10 ccw(c45.46,12.54) 48,12.54 48,15 cw(c50.5,15) 50.5,17.5 59.623,17.5 ccw(c59.623,20) 62.123,20 62.123,21.46 ccw(c59.583,21.46) 59.583,24 44.719,24 ccw(c44.719,23.981) 44.7,23.981
NetC1_2 on Top Layer "NONET_L01_P-001" (solid, pour order 1): 45,24 41.5,24 ccw(c41.5,22) 39.5,22 cw(c37,22) 37,19.5 35.04,19.5 ccw(c35.04,16.96) 32.5,16.96 32.5,12.5 ccw(c35,12.5) 35,10 45.46,10 ccw(c45.46,12.54) 48,12.54 48,15 cw(c50.5,15) 50.5,17.5 59.623,17.5 ccw(c59.623,20) 62.123,20 62.123,21.46 ccw(c59.583,21.46) 59.583,24 44.719,24 ccw(c44.719,23.981) 44.7,23.981
GND on Top Layer "NONET_L01_P-001" (solid, pour order 7): 4,4.04 ccw(c6.54,4.04) 6.54,1.5 54.96,1.5 ccw(c54.96,4.04) 57.5,4.04 57.5,9.5 33.04,9.5 cw(c33.04,12.04) 30.5,12.04 30.5,17.46 ccw(c27.96,17.46) 27.96,20 4,20
GND on Top Layer "NONET_L01_P-001" (solid, pour order 3): 48.5,12.5 48.5,15.5 cw(c49.5,15.5) 49.5,16.5 55.25,16.5 cw(c55.25,14.75) 57,14.75 57,13.5 ccw(c58.5,13.5) 58.5,12 68.46,12 ccw(c68.46,14.54) 71,14.54 71,16.5 cw(c71.75,16.5) 71.75,17.25 85.75,17.25 85.75,9.29 cw(c83.21,9.29) 83.21,6.75 51,6.75
GND on Top Layer "NONET_L01_P-001" (solid, pour order 2): 48.5,14.75 cw(c49.9,15.1) 49.55,16.5 54,16.5 cw(c53.75,13.25) 57,13 ccw(c58,13) 58,12 68.83,12 ccw(c67.79,15.21) 71,16.25 71,19 cw(c72,19) 72,20 91.5,20 cw(c91.5,18.75) 92.75,18.75 92.75,16.25 cw(c92,16.25) 92,15.5 ccw(c92,14.5) 91,14.5 91,4.04 cw(c88.46,4.04) 88.46,1.5 50.5,1.5 cw(c50.5,3.5) 48.5,3.5
GND on Bottom Layer "NONET_L01_P-001" (solid, pour order 6): 18,37.54 ccw(c20.54,37.54) 20.54,35 75.96,35 ccw(c75.96,37.54) 78.5,37.54 78.5,38.71 cw(c81.04,38.71) 81.04,41.25 81.5,41 91,41 cw(c91,40) 92,40 92,28 cw(c90,28) 90,26 88.54,26 ccw(c88.54,23.46) 86,23.46 86,22 ccw(c88,22) 88,20 91,20 cw(c91,19) 92,19 92,4.54 cw(c89.46,4.54) 89.46,2 7,2 cw(c7,4) 5,4 5,16 cw(c5,17) 4,17 4,20 8,20 ccw(c8,22) 10,22 10,24.46 ccw(c7.46,24.46) 7.46,27 6,27 cw(c6,29) 4,29 4,38.46 cw(c6.54,38.46) 6.54,41 17.5,41 cw(c17.5,40.5) 18,40.5
NetC1_2 on Bottom Layer "NONET_L01_P-001" (solid, pour order 4): 45,24 41.5,24 ccw(c41.5,22) 39.5,22 cw(c37,22) 37,19.5 35.04,19.5 ccw(c35.04,16.96) 32.5,16.96 32.5,12.5 ccw(c35,12.5) 35,10 45.46,10 ccw(c45.46,12.54) 48,12.54 48,15 cw(c50.5,15) 50.5,17.5 59.623,17.5 ccw(c59.623,20) 62.123,20 62.123,21.46 ccw(c59.583,21.46) 59.583,24 44.719,24 ccw(c44.719,23.981) 44.7,23.981

## Silkscreen, mask and mechanical layers (free items; w line width, h text height)
Top Solder:
  lines w3: 5,23 13.23,23 ccw(c13.23,24.27) 14.5,24.27 14.5,30.5 ccw(c15,30.5) 15,30 43.77,30 ccw(c43.77,31.23) 45,31.23 ccw(c43.73,31.23) 43.73,32.5 15.77,32.5 cw(c15.77,33.77) 14.5,33.77 14.5,42.73 ccw(c13.23,42.73) 13.23,44 6,44 ; 90.5,44 82.27,44 ccw(c82.27,42.73) 81,42.73 81,34.27 cw(c79.73,34.27) 79.73,33 52.27,33 ccw(c52.27,31.73) 51,31.73 51,28 51,29.23 cw(c52.27,29.23) 52.27,30.5 79.73,30.5 ccw(c79.73,31.77) 81,31.77 81,24.27 ccw(c82.27,24.27) 82.27,23 91.5,23
Bottom Solder:
  lines w3: 4.5,39 12.48,39 cw(c12.48,37.73) 13.75,37.73 13.75,5.77 ccw(c15.02,5.77) 15.02,4.5 21.5,4.5 ; 4.75,18 10.73,18 cw(c10.73,16.73) 12,16.73 12,5.77 ccw(c13.27,5.77) 13.27,4.5 20.5,4.5 ; 21.27,4.5 49.73,4.5 ccw(c49.73,5.77) 51,5.77 51,13.5 ; 51.85,14 51.85,5.77 ccw(c53.12,5.77) 53.12,4.5 ; 53.5,4.5 77.73,4.5 ; 69,4.5 80.48,4.5 ccw(c80.48,5.77) 81.75,5.77 81.75,37.73 cw(c83.02,37.73) 83.02,39 90.5,39 ; 73.75,4.5 81.73,4.5 ccw(c81.73,5.77) 83,5.77 83,7.25 ; 82.23,4.5 ccw(c82.23,5.77) 83.5,5.77 83.5,16.73 cw(c84.77,16.73) 84.77,18 91,18 ; 83.25,6.75 83.25,5.77 ; 83.25,9.5 83.25,5.77 ; 90,17.5 cw(c90.5,17.5) 90.5,18 ; 83.25,5.77 cw(c81.98,5.77) 81.98,4.5 ccw(c81.98,5.77) 83.25,5.77
Mechanical 1:
  lines w0.2: 31,0 91.73,0 ccw(c91.73,1.27) 93,1.27 93,12.73 cw(c96.066,12.73) 93.898,14.898 94.102,15.102 ccw(c91.934,17.27) 95,17.27 95,23.73 ccw(c91.934,23.73) 94.102,25.898 93.707,26.293 cw(c95.414,28) 93,28 93,33.73 cw(c96.066,33.73) 93.898,35.898 94.102,36.102 ccw(c91.934,38.27) 95,38.27 95,44.73 ccw(c91.934,44.73) 94.102,46.898 93.648,47.352 cw(c95.816,49.52) 92.75,49.52 92.75,96.73 ccw(c91.48,96.73) 91.48,98 4.27,98 ccw(c4.27,96.73) 3,96.73 3,49.27 cw(c-0.066,49.27) 2.102,47.102 1.898,46.898 ccw(c4.066,44.73) 1,44.73 1,38 ccw(c3.414,38) 1.707,36.293 2.102,35.898 cw(c-0.066,33.73) 3,33.73 3,28.27 cw(c-0.066,28.27) 2.102,26.102 1.898,25.898 ccw(c4.066,23.73) 1,23.73 1,17.27 ccw(c4.066,17.27) 1.898,15.102 2.102,14.898 cw(c-0.066,12.73) 3,12.73 3,1.27 ccw(c4.27,1.27) 4.27,0 32,0

## Text inside footprints (layer, text, board x,y; h text height)
J1: Top Overlay "+" at 43.8,18.295 h1.52 r270; Top Overlay "-" at 51.229,17.029 h1.52
J2: Top Overlay "+ESC-" at 8.754,25.246 h1.55 r270
J3: Top Overlay "+ESC-" at 8.754,46.246 h1.55 r270
J4: Top Overlay "-ESC+" at 87.496,36.504 h1.55 r90
J5: Top Overlay "-ESC+" at 87.496,15.504 h1.55 r90